# EAGLE board Funky Bigery-Hango (EAGLE 9.7.0)

Size 37.66 x 75.04 mm. Coordinates in mm from the lower left corner, seen from the top.
Outline: 0,0 37.66,0 37.66,75.04 0,75.04 0,0
Copper layers (1*16): Top 0.035mm / dielectric 1.5mm / Bottom 0.035mm
Design rules "default": minimum track width 6mil, minimum drill 0.35mm, track to track 6mil, track to pad 6mil, pad to pad 6mil, via to via 6mil, smd to smd 6mil, copper to edge 40mil, drill to drill 6mil, minimum pad ring 10mil, minimum via ring 8mil, stop-mask expansion 4mil, vias tented up to drill 0mil, thermal gap 10mil

## Footprints (pad centres in the part's own frame; a part is rotated, then mirrored left to right if it is on the bottom)
CAPPRD254W65D500H1150B = drill 0.85 pad 1.45: 1 -1.27,0; 2 1.27,0
RESAD1016W63L850D250B = drill 0.83 pad 1.43: 1 -5.08,0; 2 5.08,0
LEDRD254W51D580H541B = drill 0.921 pad 1.521: A -1.27,0; C 1.27,0

## Placement (x,y rotation side)
C1  10u  [CAPPRD254W65D500H1150B]  16.59,67.46 180 top
R1  10k  [RESAD1016W63L850D250B]  19.13,59.84 0 top
R2  10k  [RESAD1016W63L850D250B]  8.97,62.38 0 top
R3  33  [RESAD1016W63L850D250B]  8.97,44.6 0 top
U1  PHOTODIODE  [LEDRD254W51D580H541B]  29.68,6.13 90 top

## Library data of the parts
C1 R1-R3 U1 = Tinkercad

## Nets
C1_+: C1.1 R1.2
U1_A: C1.2 R1.1 R2.2 R3.2 U1.A
U1_C: R3.1 U1.C

## Tracks (layer width: path | path; a pad name or v marks a point on that pad's centre or on a via)
C1_+  (1 unrouted)
U1_A  (4 unrouted)
U1_C  (1 unrouted)